# EAGLE board ModMoPSS - IR receiver (EAGLE 9.6.2)
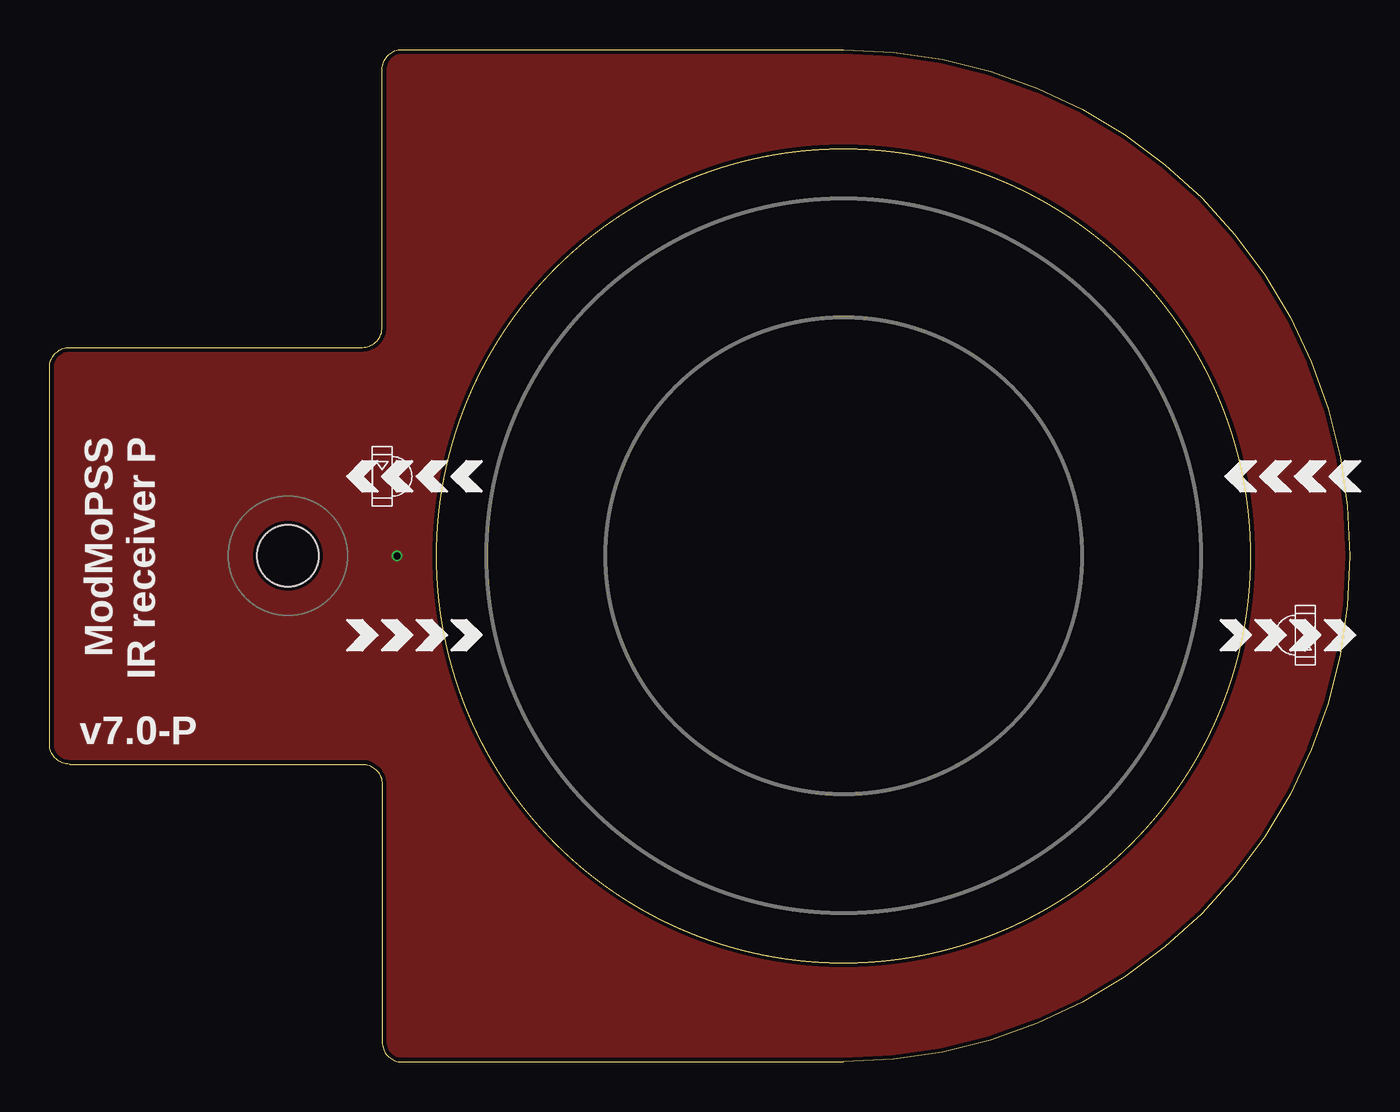
[diagram p0: board, top side]
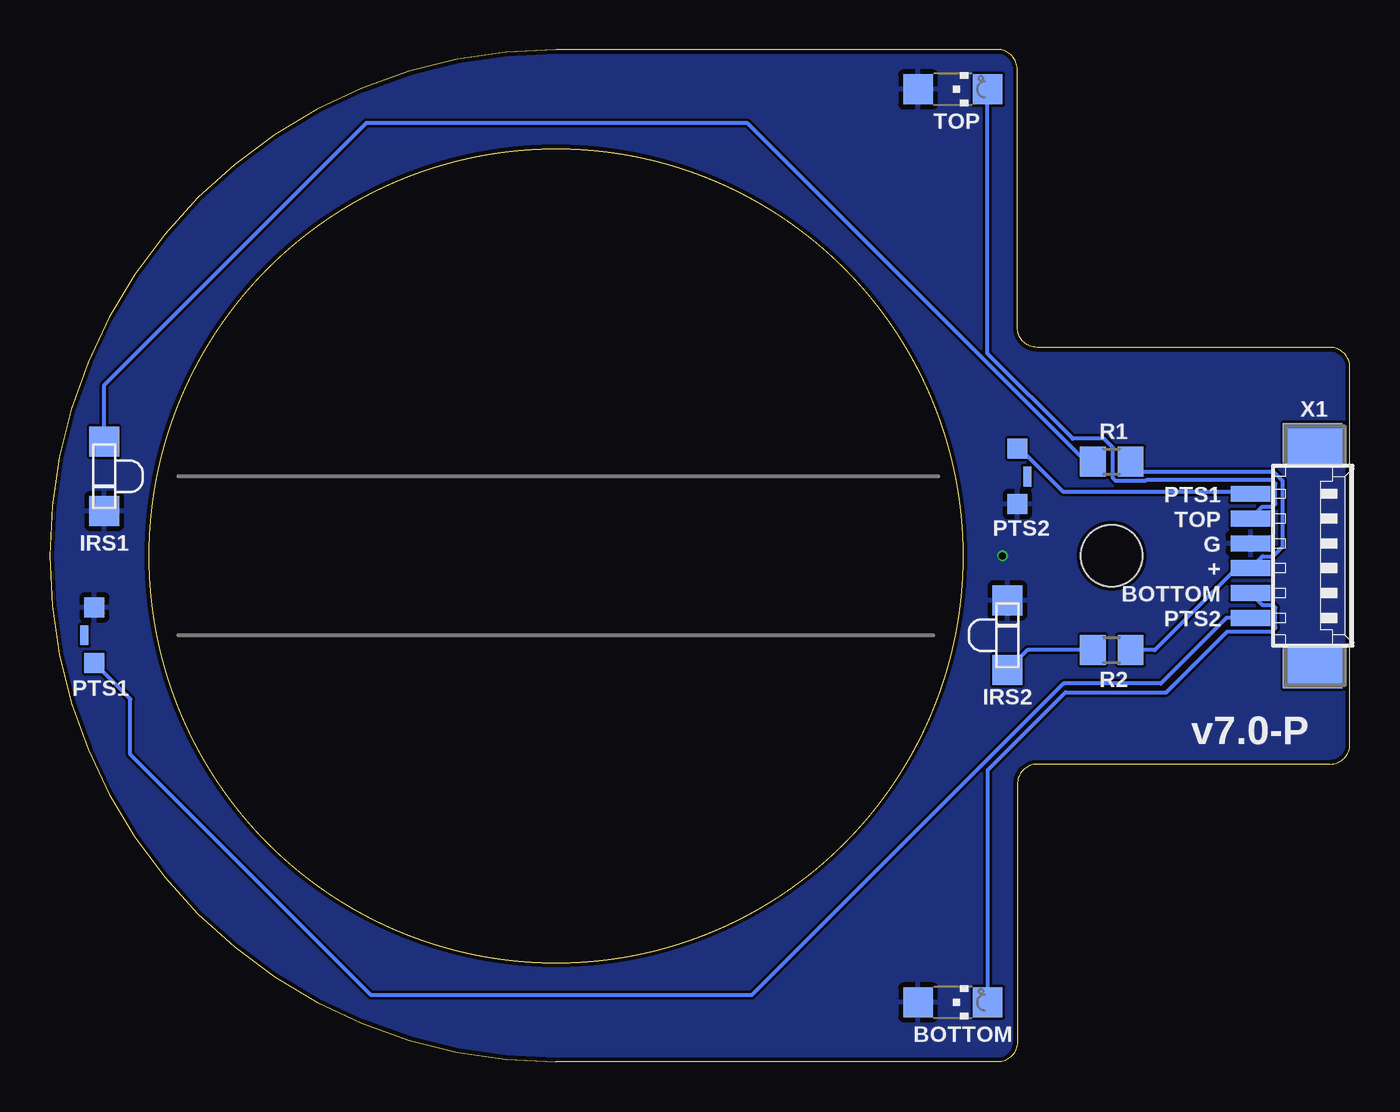
[diagram p1: board, bottom side, seen from below]

Size 65.5 x 51 mm. Coordinates in mm from the lower left corner, seen from the top.
Outline: 1,15 15.75,15 arc-90 16.75,14 16.75,1 arc90 17.75,0 40,0 arc180 40,51 17.75,51 arc90 16.75,50 16.75,37 arc-90 15.75,36 1,36 arc90 0,35 0,16 arc90 1,15
Outline: circle at 40,25.5 radius 20.5
Copper layers (1*16): Top 0.035559375mm / dielectric 1.6mm / Bottom 0.035559375mm
Design rules "jlcpcb2layer": minimum track width 5mil, minimum drill 12mil, track to track 5mil, track to pad 5mil, pad to pad 5mil, via to via 5mil, smd to smd 5mil, copper to edge 8mil, drill to drill 6mil, minimum pad ring 5mil, minimum via ring 3mil, stop-mask expansion 2.5mil, vias tented up to drill 0mil, thermal gap 10mil
Holes 3.1 mm at 12,25.5

## Footprints (pad centres in the part's own frame; a part is rotated, then mirrored left to right if it is on the bottom)
CHIPLED_1206 = smd 1.5 x 1.5: A 0,-1.75; C 0,1.75
VSMB14940 = smd 1.5 x 1.5: P$1 -1.75,0; P$2 1.75,0
PT12-21B/TR8 = smd 1 x 1: P$1 1.4,0; P$2 -1.4,0 | smd 1 x 0.4: P$3 0,-0.5
R0805 = smd 1.3 x 1.5: 1 -0.95,0; 2 0.95,0
53261-06 = smd 0.8 x 2: 1 3.125,-2.5; 2 1.875,-2.5; 3 0.625,-2.5; 4 -0.625,-2.5; 5 -1.875,-2.5; 6 -3.125,-2.5 | smd 2.1 x 3: S1 5.625,0.625; S2 -5.625,0.625

## Placement (x,y rotation side)
BOTTOM  PT11-21C/L41/TR8  [CHIPLED_1206]  20,3 270 bottom
IRS1  VSMB14940  [VSMB14940]  62.75,29.5 270 bottom
IRS2  VSMB14940  [VSMB14940]  17.25,21.5 90 bottom
PTS1  PT12-21B/TR8  [PT12-21B/TR8]  63.25,21.5 270 bottom
PTS2  PT12-21B/TR8  [PT12-21B/TR8]  16.75,29.5 90 bottom
R1  1k 1/4W  [R0805]  12,30.25 0 bottom
R2  1k 1/4W  [R0805]  12,20.75 0 bottom
TOP  PT11-21C/L41/TR8  [CHIPLED_1206]  20,49 270 bottom
X1  53261-06  [53261-06]  2.5,25.5 270 bottom

## Library data of the parts
BOTTOM IRS1 IRS2 PTS1 PTS2 TOP = 000-my_library
R1 R2 = rcl; SPICEPREFIX: R
X1 = con-molex; MF: MOLEX; OC_FARNELL: 1125375; OC_NEWARK: unknown

## Nets
+12V: R1.2 R2.2 X1.3
GND: BOTTOM.A IRS1.P$2 IRS2.P$2 PTS1.P$2 PTS2.P$2 TOP.A X1.4
N$1: BOTTOM.C X1.2
N$2: PTS1.P$1 X1.1
N$3: TOP.C X1.5
N$4: IRS2.P$1 R2.1
N$5: PTS2.P$1 X1.6
N$7: IRS1.P$1 R1.1

## Tracks (layer width: path | path; a pad name or v marks a point on that pad's centre or on a via)
+12V
  Bottom 0.203: R2.2 9.83,20.75 5.7,24.88 X1.3 4.4,25.47 3.9,25.47 3.39,25.98 3.39,29.28 3.86,29.75 10.55,29.75 R1.2
GND  (via drill 0.35)
  other vias: 17.5,25.5
  pour Bottom: -0.74,-1.9 66.69,-1.9 66.69,52.95 -0.74,52.95
  pour Top: -1.25,53.31 -1.25,-2.26 67.06,-2.26 67.06,53.31
N$1
  Bottom 0.203: X1.2 4.4,23.03 3.9,23.03 3.75,22.88 3.75,21.87 3.93,21.68 6.18,21.68 9.25,18.62 14.32,18.62 18.25,14.69 BOTTOM.C
N$2
  Bottom 0.203: X1.1 6.22,22.38 9.53,19.07 14.43,19.07 30.13,3.36 49.3,3.36 61.43,15.49 61.43,18.28 PTS1.P$1
N$3
  Bottom 0.203: X1.5 4.4,27.97 3.9,27.97 3.75,28.12 3.75,29.13 3.93,29.31 10.26,29.31 10.3,29.27 11.79,29.27 11.93,29.41 11.93,30.95 12.38,31.41 13.96,31.41 18.25,35.69 TOP.C
N$4
  Bottom 0.203: R2.1 16.25,20.75 IRS2.P$1
N$5
  Bottom 0.203: X1.6 5.11,28.74 14.47,28.74 16.63,30.9 PTS2.P$1
N$7
  Bottom 0.203: R1.1 13.42,30.36 30.38,47.32 49.54,47.32 62.75,34.1 IRS1.P$1

## Text on the board
tNames: ModMoPSS / IR receiver P | v7.0-P
bNames: PTS1 | TOP | G | + | BOTTOM | PTS2 | v7.0-P